# Altium PCB PCB1.PcbDoc (part 2 of 2)
Units mil, origin at the board's own origin, x right, y up, seen from the top; angles counter-clockwise.
Board outline 2700 x 1019 mil, 4 copper layers (L1, L2, L3, L4), stack 61.581 mil thick; 64 components, 73 nets, 299 pads, 162 vias.
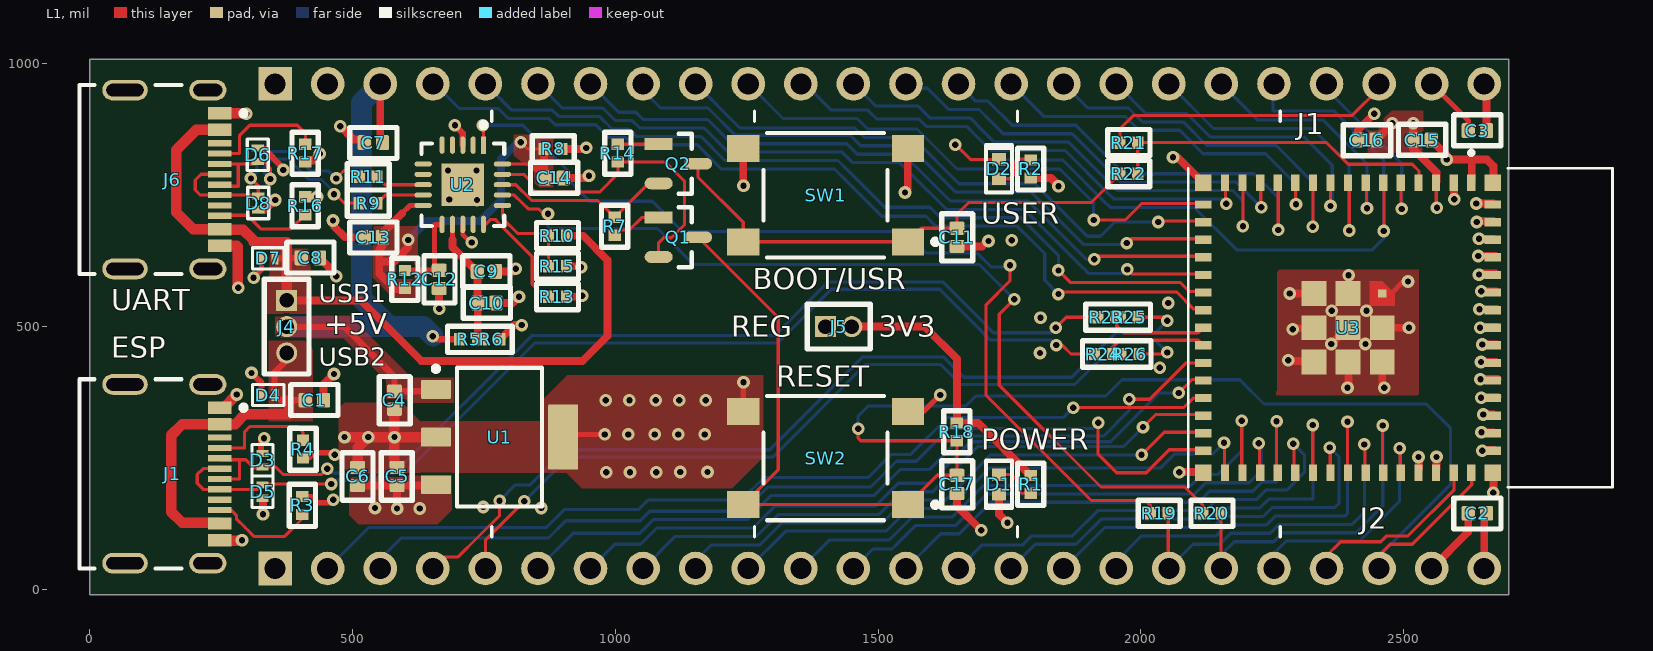
[diagram p0: L1 view]

## Part data (continued)
U1: "IC REG LINEAR 3.3V 1.5A SOT223-4", Case/Package=SOP, Dropout Voltage1-Max=550mV, Dropout Voltage1-Nom=340mV, Input Voltage Absolute-Max=20V, LCSC Part Number=C181262, Manufacturer="Texas Instruments", Min Input Voltage=3.8V, Operating Temperature, TJ-Max=125°C, Operating Temperature, TJ-Min=-40°C, Output Current1-Max=1.5A, Output Voltage1-Max=3.4V, Output Voltage1-Min=3.2V, Output Voltage1-Nom=3.3V, Package Body Material=Plastic, Package Shape=Rectangular, Peak Reflow Temperature (Cel)=260°C, Supplier Part Number=296-24897-1-ND, Voltage Tolerance-Max=3%, Adjustability=FIXED, Category="Voltage Regulators - Linear", Channels=1, ComponentLink1Description=https://www.ti.com:443/lit/ds/symlink/tl1963a.pdf?src-supplier=IHS+Markit, ComponentLink1URL=https://www.ti.com:443/lit/ds/symlink/tl1963a.pdf?src-supplier=IHS+Markit, ComponentLink2Description=https://datasheet.ciiva.com/2046/-2046068.pdf?src-supplier=Digikey, ComponentLink2URL=https://datasheet.ciiva.com/2046/-2046068.pdf?src-supplier=Digikey, Height - Seated (Max)=1.8mm, JESD-30 Code=R-PDSO-G4, JESD-609 Code=e3, Length=6.5mm, Manufacturer Part Number=TL1963A-33DCYR, Max Supply Voltage=20V, Moisture Sensitivity Level=2, Number of Outputs=1, Packaging="Tape and Reel", Pins=4, Pricing="1=2.76, 10=2.062, 25=1.8864, 100=1.6934, 250=1.60148, 500=1.54604, 1000=1.50041 (USD)", Qualification Status="Not Qualified", Reach SVHC Compliant=Yes, Regulator Type="FIXED POSITIVE SINGLE OUTPUT LDO REGULATOR", RoHS=Yes, RoHS Compliant=Yes, Stock=1664, Supplier=Digikey, Surface Mount=Yes, Technology=BIPOLAR, Terminal Finish=Tin, Terminal Form="Gull Wing", Terminal Pitch=2.3mm, Terminal Position=DUAL, Width=3.5mm
U2: "Microprocessor Circuit, CMOS", Case/Package=HVQCCN, LCSC Part Number=C132159, Manufacturer=FTDI, Max Operating Temperature=85°C, Max Supply Current=8.4mA, Max Supply Voltage=5.5V, Min Operating Temperature=-40°C, Min Supply Voltage=2.97V, Nominal Supply Voltage=5V, Package Shape=Square, Package Style="CHIP CARRIER, HEAT SINK/SLUG, VERY THIN PROFILEMeter", Power Supplies=3.3/5V, Supplier Part Number=768-1128-6-ND, Temperature Grade=INDUSTRIAL, Category="Interface ICs", ComponentLink1Description=https://datasheet.ciiva.com:443/pdfs/VipMasterIC/IC/FTDI/FTDIS00099/FTDIS00099-1.pdf?src-supplier=IHS+Markit, ComponentLink1URL=https://datasheet.ciiva.com:443/pdfs/VipMasterIC/IC/FTDI/FTDIS00099/FTDIS00099-1.pdf?src-supplier=IHS+Markit, ComponentLink2Description=https://datasheet.ciiva.com/1787/ds-ft231x-1787312.pdf?src-supplier=Digikey, ComponentLink2URL=https://datasheet.ciiva.com/1787/ds-ft231x-1787312.pdf?src-supplier=Digikey, ComponentLink3Description=https://datasheet.ciiva.com/4787/ds-ft231x-13571-4787570.pdf?src-supplier=Mouser, ComponentLink3URL=https://datasheet.ciiva.com/4787/ds-ft231x-13571-4787570.pdf?src-supplier=Mouser, ComponentLink4Description=https://datasheet.ciiva.com/30475/0900766b811020d3-30475405.pdf?src-supplier=Rs, ComponentLink4URL=https://datasheet.ciiva.com/30475/0900766b811020d3-30475405.pdf?src-supplier=Rs, ComponentLink5Description=https://datasheet.ciiva.com/1787/ft-x-series-1787313.pdf?src-supplier=Digikey, ComponentLink5URL=https://datasheet.ciiva.com/1787/ft-x-series-1787313.pdf?src-supplier=Digikey, ComponentLink6Description=https://datasheet.ciiva.com/1787/ft-x-series-1787314.pdf?src-supplier=Digikey, ComponentLink6URL=https://datasheet.ciiva.com/1787/ft-x-series-1787314.pdf?src-supplier=Digikey, Height - Seated (Max)=0.8mm, JESD-30 Code=S-XQCC-N20, Length=4mm, Manufacturer Part Number=FT231XQ-R, Pins=20, Pricing="1=2.34, 25=2.27, 100=2.2, 250=2, 500=1.82002, 1000=1.7625 (USD)", Qualification Status="Not Qualified", Reach SVHC Compliant=Yes, RoHS=Yes, RoHS Compliant=Yes, Stock=23367, Supplier=Digikey, Surface Mount=Yes, Technology=CMOS, Terminal Form="No Lead", Terminal Pitch=0.5mm, Terminal Position=QUAD, Width=4mm
U3: LCSC Part=C2980299, Manufacturer="Espressif Systems", Supplier Part Number=1965-ESP32-S3-MINI-1U-N8CT-ND, Category=LDO, ComponentLink1Description=https://datasheet.octopart.com/ESP32-S3-MINI-1U-N8-Espressif-Systems-datasheet-165560562.pdf?src-supplier=TME, ComponentLink1URL=https://datasheet.octopart.com/ESP32-S3-MINI-1U-N8-Espressif-Systems-datasheet-165560562.pdf?src-supplier=TME, Manufacturer Part Number=ESP32-S3-MINI-1U-N8, Pricing="1=5.28, 10=4.566, 25=4.3196, 100=3.9802, 250=3.7768 (USD)", RoHS=No, Stock=586, Supplier=Digikey

## Via types
v1: diameter 24, hole 12, L1 to L4, tented both sides, 162 vias

## Nets (pads, with @x,y where several pads share a name; then routed paths per layer and width w, separated by ;. In a path a pad name is that pad's centre, name@x,y a point inside that pad or via, vN(x,y) a via of type N, cw(c..) or ccw(c..) an arc to the next point about the centre after c; other vN are vias at no path point)
+3V3: C2.2 C3.2 C15.2 C16.2 J2.23 J3.24 J5.2 R1.2 R2.2 R6.1 R8.1 R18.2 U3.3 | length 4682
  L1 w6: v1@2561.79,727.21 U3.3@2561.79,767.59
  L1 w10: J2.23 2622.68,892.32 C3.2 ; v1@2561.79,727.21 v1(2563,726)
  L1 w15: R6.1 808.02,503 v1(822,503) ; R8.1 943,838 v1(945,840) ; J5.2 1589,500 1650,439 R18.2 1690,317.01 R1.2 ; R2.2 1828.99,782.99 1844,768 v1(1843.07,767.07) ; C16.2 2478,885.68 v1(2478,887) ; v1(2518,887) 2517.68,886.68 C15.2 2517.68,838.32 2562.36,793.64 U3.3@2562.36,775.59 ; J3.24 2653,140.68 C2.2
  L2 w15: v1(2478,887) v1(2518,887) ; J3.24 J3.24@2657,44
  L2 w20: 2500,869 2500,799 2529,770 2529,678 2602,605 2602,157 2657,102 J3.24@2657,44
  L2 w40: v1(822,503) 746,579 746,592 746,610 802,666 802,760 882,840 v1(945,840) 1562.13,840 1635.07,767.07 ; J5.2 1443,507 1443,590 1620.07,767.07 1635.07,767.07 ; J2.23 2553,922 v1(2518,887) 2500,869 2481,850 2136,850 2109,877 1945,877 1843.07,775.07 v1(1843.07,767.07) 1635.07,767.07
+3V3_FTDI: C13.2 C14.2 R8.2 R12.1 U2.10 U2.20 | length 856.1
  L1 w6: U2.20 843.7,809.37 ; v1(820,851) 833,838 R8.2 ; C14.2@856.85,796.22 856.85,791.14 C14.2@864.99,783
  L1 w10: 594,715 609.63,730.63 U2.10
  L1 w15: 594,715 557.32,678.32 C13.2 557.32,653.32 551,647 551,624 ; R12.1 599.01,572 580,572 551,601 551,624 ; v1(606,665) 606,651 602,647 579,624 551,624 ; 843.7,809.37 C14.2@856.85,796.22 ; C14.2@864.99,783 R8.2
  L4 w15: v1(606,665) 642,701 743,701 783,741 783,819 815,851 v1(820,851)
+3V3_REG: C5.2 C6.2 J5.1 U1.3 | length 1327.2
  L1 w15: C6.2 C5.2 ; v1(585,154) C5.2 ; v1(628,154) v1@629,153 ; U1.3 657.17,197.68 C5.2
  L2 w40: v1(543,155) 665,155 694,184 ; 1360,460 J5.1
  L2 w60: 694,184 737,227 767.29,227 877,227 933,171 1218,171 1360,313 1360,460
+5V: C4.2 C7.2 J2.3 J4.2 R5.2 U1.1 | length 1304.3
  L1 w12: J4.2 485,500 580,405 C4.2 655.71,377.32 U1.1 ; v1(653,482) 656.25,482 662.25,476 R5.2
  L1 w15: J2.3 553,854.32 C7.2
  L4 w40: J4.2 571,500 ; J2.3 517,926 517,554 571,500 ; v1(653,482) 635,500 571,500
+5V_VBUS1: C8.2 D7.2 J4.1 J6.A4B9 J6.B4A9 R10.2 | length 1532.6
  L1 w12: D7.2 375,630 401.68,630 C8.2
  L1 w15: J4.1 516,550 631,435 938,435 985,482 985,627 939,673 R10.2
  L1 w20: J6.A4B9 203.41,874.41 165,836 165,718 197.57,685.43 J6.B4A9 249.13,683.94 288.49,683.94 292.49,683.94 312,664.43 312,661 375,661 375,630 J4.1
+5V_VBUS2: C1.2 D4.2 J1.A4B9 J1.B4A9 J4.3 | length 668.2
  L1 w12: D4.2 D4.2@352,370.8 ; J4.3 375,436 352,413 D4.2@352,370.8 ; C1.2 380,360 362.8,360 D4.2@352,370.8
  L1 w20: J1.B4A9 246.23,127 176,127 155,148 155,293 176.57,314.57 J1.A4B9 277.04,314.57 295.47,333 380,333 380,360
+VCC_FTDI: C9.2 C10.2 R5.1 R6.2 U2.12 | length 240.3
  L1 w9: C9.2@729.64,611.67 C9.2@732.58,611.67
  L1 w10: 690.31,665.25 U2.12
  L1 w15: 690.31,665.25 690.31,651 C9.2@729.64,611.67 ; C9.2@732.58,611.67 737.68,606.57 C9.2 737.68,545.68 C10.2 R6.2@738.35,485.35 ; R6.2@738.35,476.35 R5.1 R6.2
BTN_GPIO0: C11.2 Q2.3 R22.1 SW1.1 SW1.2 | length 970
  L1 w6: Q2.3 1157.42,784.58 1243.5,698.5 SW1.2 SW1.1 1582.4,687.32 C11.2 1650,714 1672,736 1904.98,736 R22.1
CHIP_PU: C17.2 J3.22 Q1.3 R18.1 SW2.1 SW2.2 U3.45 | length 3125.5
  L1 w6: Q1.3 1310,517.42 1310,227.91 SW2.2 SW2.1 1612.4,217.32 C17.2 R18.1 1467.01,282.99 1462,288 v1(1462,306) ; J3.22 2453,65 2474,86 2516,86 2629.29,199.29 U3.45@2629.29,224.41
  L4 w6: v1(1462,306) 1462,330 1481,349 1667,349 1686,368 1933,368 1964,399 2188,399 2234,353 2297,353 2542.5,353 2589,306.5 2589,200 2474,85 2453,64 J3.22
CON1_USB_N: D6.2 J6.A7 J6.B7 R9.1 | length 456.5
  L1 w6.03: J6.A7 250.72,767 283,767 283,809.45 ; J6.B7 283,809.45 ; v1(344,781) 344,801 330.8,814.2 D6.2 315.24,809.45 283,809.45 ; v1(465,752) 468,752 485,735 R9.1
  L4 w6.03: v1(344,781) 332.51,792.48 332.51,802.52 349,819 378,819 417,780 441.28,780 460.3,760.98 465,760.98 v1(465,752)
CON1_USB_P: D8.2 J6.A6 J6.B6 R11.1 | length 508.9
  L1 w6.03: J6.A6 247.4,790 212,790 201,779 201,760 210.61,750.39 J6.B6 321,750.39 D8.2 321,768 v1(307,782) ; v1(469,782) 484,797 500.99,797 504.2,793.8 505.38,793.8 512.99,786.18 R11.1
  L4 w6.03: v1(307,782) 318.49,793.48 318.49,814.48 337.03,833.03 383.81,833.03 420.84,796 455,796 v1(469,782)
CON2_USB_N: D3.2 J1.A7 J1.B7 R23.1 | length 1969.3
  L1 w6.03: J1.A7 285,210.24 285,247 ; J1.B7 250.24,247 285,247 ; v1(452.26,229.74) 441.53,219 368,219 354,233 D3.2 327,231 313,231 297,247 285,247 ; v1(1838,498) 1858,518 R23.1
  L4 w6.03: v1(452.26,229.74) 460.23,221.77 580,221.77 841.23,483 1303,483 1405.11,585.11 1622.73,585.11 1694.92,512.92 1719.33,488.52 1828.51,488.52 v1(1838,498)
CON2_USB_P: D5.2 J1.A6 J1.B6 R24.1 | length 1995.3
  L1 w6.03: J1.A6@244.72,227 J1.A6 215.92,229.92 205,219 205,202 216.45,190.55 J1.B6 320.55,190.55 331,201 453.18,201 456.47,204.29 v1(460,200.75) ; v1(1839,465) 1850,465 1867,448 R24.1
  L4 w6.03: v1(460,200.75) 460,207.74 509,207.74 585.81,207.74 847.05,468.97 1308.81,468.97 1410.92,571.08 1616.92,571.08 1680.89,507.11 1713.51,474.48 1829.51,474.48 v1(1839,465)
CON_ESP_USB_N: J3.4 R25.1 | length 1698
  L1 w6.03: J3.4 675,62 701.16,62 738.97,99.81 780,140.84 v1(780,169) ; R25.1 2043.3,518 v1(2050,511.3)
  L4 w6.03: v1(780,169) 810,199 838.16,199 904.96,265.8 908.8,265.8 1293.83,265.8 1470.01,441.99 1625.01,441.99 1663.08,403.92 1868.08,403.92 1952.32,488.16 2026.87,488.16 v1(2050,511.3)
CON_ESP_USB_P: J3.5 R26.1 | length 1604.8
  L1 w6.03: J3.5 753,94 v1(827,168) ; R26.1 2047,448 v1(2050,451)
  L4 w6.03: v1(827,168) 910.77,251.77 1299.64,251.77 1475.82,427.96 1619.2,427.96 1657.27,389.89 1873.89,389.89 1958.13,474.13 2026.87,474.13 v1(2050,451)
CON_GPIO0: J2.22 R21.1 | length 559.9
  L1 w6: R21.1 1959.99,875.99 1986,902 2402,902 2453,953 J2.22
DTR_FTDI: Q2.2 R7.1 U2.18 | length 349.8
  L1 w6: U2.18 810.94,770 839.94,741 840,741 ; 839.97,740.97 840.94,740 843.42,740 843.59,739.83 923.77,739.83 923.94,740 967.02,740 R7.1 1063.58,772.6 Q2.2
ESP_USB_N: R23.2 R25.2 U3.23 | length 193.6
  L1 w6.03: R25.2 1954,511.01 1954,501 1966.72,488.28 2108.73,488.28 U3.23
ESP_USB_P: R24.2 R26.2 U3.24 | length 194.7
  L1 w6.03: R24.2 1945.7,459.95 1960,474.25 2108.73,474.25 U3.24
FTDI_RESET: C12.2 R12.2 U2.11 | length 169.6
  L1 w10: R12.2 600.31,607.32 C12.2 656,616.32 656,694 U2.11@670.04,694
FTDI_USB_N: R9.2 U2.9 | length 93.9
  L1 w6.03: R9.2 562.32,750.31 U2.9
FTDI_USB_P: R11.2 U2.8 | length 93.8
  L1 w6.03: R11.2 562.01,770 U2.8
GND: C1.1 C2.1 C3.1 C4.1 C5.1 C6.1 C7.1 C8.1 C9.1 C10.1 C11.1 C12.1 C13.1 C14.1 C15.1 C16.1 C17.1 D1.1 D3.1 D4.1 D5.1 D6.1 D7.1 D8.1 J1.A1B12 J1.B1A12 J1.S1 J1.S2 J1.S3 J1.S4 J2.2 J2.24 J3.1 J3.23 J6.A1B12 J6.B1A12 J6.S1 J6.S2 J6.S3 J6.S4 R3.1 R4.1 R13.2 R15.2 R16.1 R17.1 SW1.3 SW1.4 SW2.3 SW2.4 U1.2 U1.4 U2.3 U2.13 U2.21 U3.1 U3.2 U3.42 U3.43 U3.46 U3.47 U3.48 U3.49 U3.50 U3.51 U3.52 U3.53 U3.54 U3.55 U3.56 U3.57 U3.58 U3.59 U3.60 U3.61 U3.62 U3.63 U3.64 U3.65 U3.66 U3.67 U3.68 U3.69 U3.70 U3.71 U3.72 U3.73 | length 3806.3
  L1 w9: U2.13 710.1,694.48 710.1,675.15 723.26,662 726.77,662 v1(726.77,660.24) ; v1@1243.5,393.5 v1(1244,394) ; 2476,562.96 2499.04,586 v1(2508,586)
  L1 w10: v1(312,593) 327.2,608.2 D7.1 ; R3.1 420.99,177.01 433,165 467,165 467,171 465.26,172.74 v1(463.47,170.95) ; R4.1 418,250 428,260 462.53,260 v1(466.25,256.27) ; U1.4 906.06,295 v1@978,295 ; SW2.4 v1@1243.5,393.5 ; SW2.3 1586.58,338.58 v1(1618,370)
  L1 w12: v1@316,404 327.2,392.8 D4.1 ; D6.1@324.92,839.8 D6.1 320.89,838.91 331.06,838.91 368.73,801.23 v1(368.73,797.98) ; D3.1 326,261.59 326,282 v1(332,288) ; v1(695,883) 710,868 U2.3 ; U3.69 2394.04,597.04 v1(2395,598)
  L1 w15: J1.A1B12 J1.A1B12@255.06,346.06 ; D8.1 321.61,723.02 333.81,723.02 351.79,741 v1(353,741) ; v1(330,143.41) D5.1@330,173.41 ; R16.1 v1(432.99,747.01) ; R17.1 413.13,816.12 424.9,816.12 437.69,828.91 v1(438.19,828.91) ; C8.1 469,599.32 v1(469,596) ; C1.1 445,390 v1(465,410) ; v1(463,702) 464.72,700.28 464.72,691.28 486,670 C13.1 ; v1(477,881) 501.97,856.03 517.58,856.03 522.68,850.94 C7.1 ; v1(665,534) C12.1 ; C9.1 806,605 v1(811,610) ; C10.1 805,545 v1(817,557) ; C14.1 946,783 v1(950,787) ; R13.2 935,557 v1(937,559) ; R15.2 933,615 v1(935,613) ; SW1.4 1243.5,768.5 v1(1244,768) ; v1(1551.13,755.13) 1556.5,760.5 SW1.3 ; C11.1 1697.68,652.68 v1@1702,657 ; C17.1@1651.38,181.3 C17.1 1650,159 v1(1696.43,112.57) ; D1.1 1730,143 v1(1746,127) ; v1(2061,822) 2070.04,822 U3.63 ; v1(2073,223) 2073.7,223.7 2118.74,223.7 U3.64@2119.45,224.41 ; v1(2280,436) 2281,435 U3.73@2328.88,435 ; v1(2283,563) U3.71@2331.88,563 ; v1(2289,495) 2291,497 U3.72@2331.88,497 ; v1(2362,467) U3.61@2395.04,500 ; v1(2393,384) 2395,386 U3.70@2395,436.88 ; C16.1 2412.68,873.68 v1(2444,905) ; U3.68@2459,439.88 2459,388 v1(2463,384) ; U3.67@2460.12,498 v1(2510,498) ; v1@2527,251 2528.79,249.21 U3.42@2528.79,229.37 ; C15.1 2582,825.32 v1(2582,818) 2582.29,817.71 2629.29,817.71 ; J3.23 2622.68,109.68 C2.1 ; U3.43@2562.25,229.37 v1(2562.25,252.25) ; v1(2595.83,742.17) U3.2@2595.83,775.59 ; U3.1@2629.29,775.59 2629.29,817.71 ; v1(2637.75,734.25) U3.60@2670.63,734.25 ; v1(2639,699) 2640.79,700.79 U3.59@2670.63,700.79 ; v1(2641.85,634.36) U3.57@2674.74,634.36 ; v1(2643,667) U3.58@2671.42,667 ; v1(2643.11,599.11) 2644.89,600.89 U3.56@2674.74,600.89 ; v1(2643.85,533.36) U3.54@2676.74,533.36 ; v1(2645.11,498.11) 2646.89,499.89 U3.53@2676.74,499.89 ; v1(2645.75,400.25) U3.50@2678.63,400.25 ; v1(2646.89,432.89) U3.51@2675.31,432.89 ; v1(2647,365) 2648.79,366.79 U3.49@2678.63,366.79 ; v1(2647.11,567.11) U3.55@2675.52,567.11 ; v1(2647.75,299.25) U3.47@2670.63,299.25 ; v1(2649,264) 2650.79,265.79 U3.46@2670.63,265.79 ; v1(2649.11,466.11) U3.52@2677.52,466.11 ; v1(2651,333) U3.48@2670.63,333 ; J2.24 2657.32,957.68 C3.1 ; v1(2670,184) 2670.63,184.63 U3.65@2670.63,224.41 ; U3.62@2670.63,775.59 2670.63,805.37 2658,818 2629,818 2629.29,817.71
  L1 w20: J1.B1A12 248.73,93 v1@280,93 ; J6.B1A12 280.06,653.94 282,652 282,575 v1(283,574) ; J6.A1B12 297.09,905.91 v1(298,905) ; J1.A1B12@255.06,346.06 v1(280,371) ; v1(485,290) v1(530,290) ; C6.1 510,270 v1(530,290) ; C4.1 v1(580,290) ; C5.1 580,237.32 v1(580,290) ; U1.2 v1(580,290) ; v1(530,290) v1(580,290)
  other v1: 290,94 859,155 749,157 983,223 1028,223 1078,223 1123.5,223.5 1175.5,223.5 2528,252 980,295 1025,295 1075,295 1120,295 1170,295 982,360 1027,360 1077,360 1122,360 1172,360 308,412 2036,422 1808,450 2427,467 1809,517 2363,530 2429,530 2052,545 1710,663 1754.5,664.5 737,741 684,742 682,797 736,797
GPIO0: R21.2 R22.2 U3.4 | length 638.3
  L1 w6: R22.2 R21.2 2353,850 2394,809 2516,809 2528.9,796.1 2528.9,775.59 U3.4@2530,774.49
GPIO1: J2.21 U3.5 | length 347.4
  L1 w6: v1@2494.79,725.21 U3.5@2494.79,765.59
  L4 w6: J2.21@2353,953 J2.21 2353,951.64 2437.64,867 2439,867 2496,810 v1(2496,724)
GPIO2: D2.1 J2.20 U3.6 | length 1547.1
  L1 w6: v1@1651.88,841.12 v1(1647,846) 1648,846 1676,818 1719,818 1719.7,818.7 D2.1 ; v1@2462.25,682 U3.6@2462.25,769.59
  L4 w6: v1(1647,846) 1676,817 1851.12,817 1933.12,735 1933.49,735 1941.49,727 2101,727 2182,646 2440,646 2462,668 v1(2462,682) 2462,816 2368,910 2251,910 2251,960 J2.20
GPIO3: J2.19 U3.7 | length 472.4
  L1 w6: v1@2428.79,726.21 U3.7@2428.79,766.59
  L4 w6: J2.19@2158,957 J2.19 2222,893 2347,893 2430,810 v1(2430,725)
GPIO4: J2.18 U3.8 | length 619.6
  L1 w6: v1@2396.25,683 U3.8@2396.25,770.59
  L4 w6: J2.18 2138,877 2326,877 2397,806 2396,805 v1(2396,683)
GPIO5: J2.17 U3.9 | length 598.4
  L1 w6: v1(2360.57,729.43) U3.9
  L4 w6: J2.17 2009.5,905.5 2086.87,905.5 2131.37,861 2310,861 2364,807 2364,732.85 v1(2360.57,729.43)
GPIO6: J2.16 U3.10 | length 724
  L1 w6: v1@2327.25,690 U3.10@2327.25,777.59
  L4 w6: J2.16 1899,916 1976.37,916 1999.37,893 2002.87,889.5 2080.25,889.5 2124.75,845 2257,845 2327,775 v1(2327,690)
GPIO7: J2.15 U3.11 | length 699.5
  L1 w6: v1@2293.79,734.21 U3.11@2293.79,774.59
  L4 w6: J2.15 1815,900 1892.37,900 1969.75,900 1996.25,873.5 2073.62,873.5 2118.12,829 2237,829 2295,771 v1(2295,733)
GPIO8: J2.14 U3.12 | length 846.5
  L1 w6: v1@2261.25,684 U3.12@2261.25,771.59
  L4 w6: J2.14 1685.95,929.05 1708.95,929.05 1755,883 1876,883 1968,791 2077.36,791 2215,791 2261,745 v1(2261,684)
GPIO9: J2.13 U3.13 | length 813.7
  L1 w6: v1@2227.79,728.21 U3.13@2227.79,768.59
  L4 w6: J2.13 1561.51,953.49 1594,953.49 1634.44,913.05 1691.95,913.05 1715.05,889.95 1738,867 1869,867 1953,783 1953.37,783 1961.37,775 2022.64,775 2059.36,775 2181,775 v1(2229,727)
GPIO10: J2.12 U3.14 | length 969.2
  L1 w6: v1@2194.25,691 U3.14@2194.25,778.59
  L4 w6: J2.12 1495,920 1575.25,920 1598.2,897.05 1641.07,897.05 1675.03,897.05 1699.05,873.03 1721.08,851 1862.37,851 1946.37,767 1946.75,767 1954.75,759 2016.02,759 2065.98,759 2174.37,759 2194,739.37 v1(2194,691)
GPIO11: J2.11 U3.15 | length 943.8
  L1 w6: v1@2160.79,735.21 U3.15@2160.79,775.59
  L4 w6: J2.11 1361,962 1411,912 1480.37,912 1497.37,895 1577.63,895 1591.58,881.05 1647.69,881.05 1668.41,881.05 1683.05,866.41 1714.46,835 1855.75,835 1939.75,751 1940.12,751 1948.12,743 2153,743 v1(2162,734)
GPIO12: J2.10 U3.16 | length 1006.3
  L1 w6: v1(1910,703) 1970,703 2001.25,734.25 U3.16@2119.45,734.25
  L4 w6: J2.10 1319,896 1404.37,896 1460,896 1480,876 1574,876 1650,800 1845.49,800 1910.75,734.75 1910,734 v1(1910,703)
GPIO13: J2.9 U3.17 | length 1098.5
  L1 w6: v1(2033,699) 2034.79,700.79 U3.17@2119.45,700.79
  L4 w6: J2.9 1237,878 1455.37,878 1473.37,860 1566,860 1654,772 1798,772 1898,672 1923,672 1950,699 v1(2033,699)
GPIO14: J2.8 U3.18 | length 1205.5
  L1 w6: v1(1973,659) 1981.32,667.32 U3.18@2119.45,667.32
  L4 w6: J2.8 1053,949 1086,916 1176.37,916 1228.37,864 1391.12,864 1446.75,864 1466.75,844 1559.37,844 1647.37,756 1791.37,756 1891.37,656 1970,656 v1(1973,659)
GPIO15: J2.7 U3.19 | length 1307.2
  L1 w6: v1(1911,628) 1916.86,633.86 U3.19@2119.45,633.86
  L4 w6: J2.7 1007,908 1039,908 1053,894 1175.75,894 1221.75,848 1384.49,848 1440.12,848 1460.12,828 1547.68,828 1572.01,803.68 1572.31,803.68 1636.8,739.19 1784.81,739.19 1896,628 v1(1911,628)
GPIO16: J2.6 U3.20 | length 1422.8
  L1 w6: v1(1974,608.86) 1974.07,608.93 1982.61,600.39 U3.20@2119.45,600.39
  L4 w6: J2.6 899,916 976.37,916 1000.37,892 1032.37,892 1046.37,878 1169.12,878 1215.12,832 1377.86,832 1432,832 1452,812 1541.06,812 1564.06,789 1564.36,789 1630.17,723.19 1778.19,723.19 1889.37,612 1890,612 1901,601 1966.14,601 v1(1974,608.86)
GPIO17: J2.5 U3.21 | length 1546.9
  L1 w6: v1(1843,607) 1866.14,583.86 2075.14,583.86 2092.07,566.93 U3.21@2119.45,566.93
  L4 w6: J2.5 803,912 880.37,912 892.37,900 969.75,900 993.75,876 1025.75,876 1039.75,862 1162.49,862 1208.49,816 1371.24,816 1423.75,816 1443.37,796.37 1512.65,727.09 1598.77,727.09 1618.68,707.19 1771.56,707.19 1843,635.75 v1(1843,607)
GPIO18: J2.4 U3.22 | length 1677.2
  L1 w6: v1(1843,562) 1847,566 2068,566 2100.54,533.46 U3.22@2119.45,533.46
  L4 w6: J2.4 656,962 703,915 777.37,915 796.37,896 873.75,896 885.75,884 963.12,884 987.12,860 1019.12,860 1033.12,846 1155.86,846 1201.86,800 1364.61,800 1417.12,800 1437.56,779.56 1507.12,710 1591.05,710 1609.86,691.19 1764.93,691.19 1817,639.12 1817,588 v1(1843,562)
GPIO21: J3.6 U3.25 | length 1439.7
  L1 w6: v1(1978,362) 2017,362 2086.07,431.07 U3.25
  L4 w6: J3.6 920,107 1046.37,107 1072.37,133 1251,133 1297,179 1486,179 1492.6,179 1541.6,228 1597,228 1661,292 1929,292 1978,341 v1(1978,362)
GPIO26: J3.7 U3.26 | length 1315.4
  L1 w6: v1(2072,374) 2097.61,399.61 U3.26@2119.45,399.61
  L4 w6: J3.7 999,86 1048,86 1079,117 1262.12,117 1295.12,150 1304.12,159 1495.22,159 1538.22,202 1597,202 1676,281 1942,281 2035,374 v1(2072,374)
GPIO33: J3.8 U3.28 | length 1187.7
  L1 w6: v1(2004,309) 2027.68,332.68 U3.28@2119.45,332.68
  L4 w6: J3.8 1114,101 1268.75,101 1310.75,143 1501.85,143 1544.85,186 1603.63,186 1689.63,272 1967,272 v1(2004,309)
GPIO34: J3.9 U3.29 | length 1082.6
  L1 w6: v1(2001.18,256.18) 2044.21,299.21 U3.29@2119.45,299.21
  L4 w6: J3.9 1153,55 1183,85 1275.37,85 1315.37,125 1317.37,127 1508.48,127 1551.48,170 1610.25,170 1628,170 1714,256 1953.63,256 1953.81,256.18 v1(2001.18,256.18)
GPIO35: J3.10 U3.31 | length 1044.4
  L1 w6: U3.31@2159.21,237.41 v1@2159.21,277.79
  L4 w6: J3.10 1324,111 1515.11,111 1558.11,154 1616.88,154 1634.63,154 1711.63,231 2037,231 2064,258 2137,258 v1(2158,279)
GPIO36: J3.11 U3.32 | length 1076
  L1 w6: U3.32@2191.75,233.41 v1@2191.75,321
  L4 w6: J3.11 1407,94 1512.06,94 1514.37,94 1519.1,94.39 ; 1519.15,94.39 ccw(c1518.61,100.37) 1522.86,96.12 1564.73,138 1605.75,138 1632.75,138 1641.25,138 1701.25,198 1820.49,198 1896,198 2096,198 2117,219 2147,219 2192,264 v1(2192,321)
GPIO37: J3.12 U3.33 | length 947.5
  L1 w6: U3.33@2225.21,236.41 v1@2225.21,276.79
  L4 w6: J3.12 1490,77 1526.36,77 1534.36,85 1571.36,122 1612.37,122 1639.37,122 1647.88,122 1707.88,182 1904.49,182 2102.63,182 2123.63,203 2205.98,203 2223.98,221 2229,226 2229,273 v1(2224,278)
GPIO38: J3.13 U3.34 | length 975.9
  L1 w6: U3.34@2257.75,232.41 v1@2257.75,320
  L4 w6: J3.13 1619,106 1646,106 1654.51,106 1714.51,166 2109.25,166 2115.25,172 2130.25,187 2212.61,187 2230.61,205 2258,205 v1(2258,320)
GPIO39: J3.14 U3.35 | length 836.9
  L1 w6: U3.35@2291.21,235.41 v1@2291.21,275.79
  L4 w6: J3.14 1698,85 1775.37,85 1792.37,102 1869.75,102 1917.75,150 2123.25,150 2144.25,171 2219.24,171 2237.24,189 2277,189 2311,223 2311,256 v1(2290,277)
GPIO40: J3.15 U3.36 | length 857.3
  L1 w6: U3.36@2326.75,225.41 v1@2326.75,313
  L4 w6: J3.15 1799,86 1876.37,86 1924.37,134 2129.88,134 2150.88,155 2225.86,155 2242.86,172 2327,172 v1(2327,313)
GPIO41: J3.16 U3.37 | length 729.2
  L1 w6: U3.37@2360.21,228.41 v1@2360.21,268.79
  L4 w6: J3.16 1931,118 2136.51,118 2157.51,139 2232.49,139 2249.49,156 2369,156 2377,164 2377,252 v1(2359,270)
GPIO42: J3.17 U3.38 | length 753.6
  L1 w6: U3.38@2392.75,231.41 v1@2392.75,319
  L4 w6: J3.17 1953,54 2001,102 2143.14,102 2164.14,123 2239.12,123 2256.12,140 2388.49,140 2393,144.51 v1(2393,319)
GPIO45: J3.20 U3.41 | length 450.2
  L1 w6: U3.41@2493.21,227.41 v1@2493.21,267.79
  L4 w6: J3.20 2253,69 2276,92 2415.63,92 2492,168.37 v1(2492,269)
GPIO46: J3.21 U3.44 | length 353.5
  L1 w6: J3.21 2353,64 2380,91 2456.37,91 2467.37,102 2508,102 2595.83,189.83 U3.44@2595.83,224.41
GPIO47: J3.2 U3.27 | length 1799.7
  L1 w6: v1(1871,346) 2081,346 2099.14,364.14 U3.27
  L4 w6: J3.2 531,118 869,118 903,152 1044,152 1062,170 1240,170 1283,213 1481,213 1525,257 1562,257 1632,327 1852,327 v1(1871,346)
GPIO48: J3.3 U3.30 | length 1785.2
  L1 w6: v1(1919,317) 1918,316 1918,258 1954,222 2010,222 2053.75,265.75 U3.30@2119.45,265.75
  L4 w6: J3.3 553,58 593,98 873,98 905.69,130.69 1047.43,130.69 1065.75,149 1244.37,149 1290.37,195 1485.97,195 1534.97,244 1572.8,244 1634.8,306 1908,306 v1(1919,317)
NetD1_2: D1.2 R1.1 | length 83.6
  L1 w5: D1.2 1753.3,218.7 1769,203 1769,188 1774.01,182.99 R1.1
NetD2_2: D2.2 R2.1 | length 88.7
  L1 w6: D2.2 1750.3,781.3 1759,790 1759,811 1767,819 1788.01,819 R2.1
NetJ1_A5: J1.A5 R4.2 | length 212.3
  L1 w6: J1.A5 294.29,269.29 295,270 295,300 305,310 395,310 406,299 R4.2
NetJ1_B5: J1.B5 R3.2 | length 204.2
  L1 w6: J1.B5 269.22,151.18 279.28,141.13 279.28,134.72 296,118 296,117.64 298.64,115 298.7,115 312.7,101 371,101 405,135 R3.2
NetJ6_A5: J6.A5 R17.2 | length 232.6
  L1 w6: J6.A5 284.13,829.13 285,830 285,863 305,883 323,883 395,883 410,868 411,868 411,848.01 R17.2
NetJ6_B5: J6.B5 R16.2 | length 184.8
  L1 w6: J6.B5 248.61,712 300.19,712 300.19,711.79 325.98,686 383.01,686 R16.2
NetQ1_1: Q1.1 R7.2 | length 97.4
  L1 w6: R7.2 1009,684 1027,684 1050.4,707.4 Q1.1
NetQ2_1: Q2.1 R14.2 | length 77.7
  L1 w6: R14.2 1082.18,847.01 Q2.1
NetR13_1: R13.1 U2.15 | length 219.4
  L1 w6: U2.15 753.59,694.59 763,704 772,704 773.41,702.59 773.41,701.62 842,633.03 842,581 866,557 R13.1
RTS_FTDI: Q1.2 R14.1 U2.19 | length 592.3
  L1 w6: U2.19 825.94,789.69 838,777.63 838,765.57 847.57,756 850.04,756 850.22,755.83 882.49,755.83 882.67,756 884.69,756 884.86,755.83 917.14,755.83 917.31,756 970,756 1005,791 R14.1 1095.01,812.99 1131.92,776.08 1131.92,694.26 1117.71,680.05 1117.71,679.71 1107,669 1092,669 1082.58,659.58 Q1.2
RXD_FTDI: R19.2 U2.1 | length 1845.3
  L1 w6: v1(748,883) 749.37,881.63 U2.1 ; v1(1751,617) 1751,587 1705,541 1705,370 1906,169 2009.5,169 2017.99,160.51 R19.2
  L4 w6: v1(748,883) 824,883 912,795 912,778 951.5,738.5 1070.5,738.5 1128,681 1551,681 1592,640 1688.49,640 1714.66,613.83 1747.83,613.83 v1(1751,617)
TXD_FTDI: R20.2 U2.17 | length 1744.7
  L1 w6: U2.17 808,750.31 823.97,734.34 834.32,724 836.79,724 836.96,723.83 854.48,723.83 863.48,714.83 v1(872,714.83) ; v1(1759,552) 1730.5,523.5 1730.5,388.5 1924,195 2083,195 2117.99,160.01 R20.2
  L4 w6: v1(872,714.83) 872,686.64 1080.36,686.64 1149,618 1693,618 v1(1759,552)
U0RXD: J3.19 R20.1 U3.40 | length 717.9
  L1 w6: R20.1 2152.01,40.99 J3.19 ; U3.40@2459.75,224.41 v1@2459.75,312
  L4 w6: J3.19 2153,66.61 2177.39,91 2252.37,91 2269.37,108 2409,108 2460,159 v1(2460,312)
U0TXD: J3.18 R19.1 U3.39 | length 691.1
  L1 w6: R19.1 2052.01,40.99 J3.18 ; U3.39@2426.21,234.41 v1@2426.21,274.79
  L4 w6: J3.18 2099,86 2135.36,86 2149.76,86 2170.76,107 2245.75,107 2262.75,124 2402,124 2425,147 v1(2425,276)
VBUS_SENSE: R10.1 R15.1 U2.16 | length 183.5
  L1 w6: U2.16 785.41,706.59 815,677 868.98,677 R10.1 R15.1
pads on no net: J1.A8 J1.B8 J2.1 J6.A8 J6.B8 U2.2 U2.4 U2.5 U2.6 U2.7 U2.14

## Polygon pours and split planes (outlines as drawn)
GND on L1 "NONET_L-01_P-001" (solid, pour order 23): 2259,377.5 2259,603.5 2263.5,608 2528,608 2528,371 2526.5,369.5 2257.5,369.5 2257.5,395.5
GND on L1 "NONET_L-01_P-001" (solid, pour order 24): 493.5,222 474,241.5 474,345 484.5,355.5 594.5,355.5 629.5,320.5 859.5,320.5 859.5,358.5 909,408 1281.5,408 1281.5,252 1222,192.5 936.5,192.5 907,222
+3V3_REG on L1 "NONET_L-01_P-001" (solid, pour order 22): 494,216 689,216 689,151 662,124 511,124 494,141
+5V_VBUS2 on L1 "NONET_L-01_P-001" (solid, pour order 20): 340,320 341,321 341,473 409,473 425,457 425,433 425,320 341,320
+5V on L1 "NONET_L-01_P-001" (solid, pour order 21): 353,478 353,521 495,521 613,403 692,403 693,402 693,355 609,355 601,363 564,363 564,397 483,478
+5V_VBUS1 on L1 "NONET_L-01_P-001" (solid, pour order 18): 342,585 343.5,648 421,648 421,525 336,525 336,585
+3V3_FTDI on L1 "NONET_L-01_P-001" (solid, pour order 19): 624,554 624,555 624,691 541,691 540,692 539,691 539,593 578,554 623,554
+3V3_FTDI on L1 "NONET_L-01_P-001" (solid, pour order 16): 807,826 807,865 882,865 882,806 882,765 855,765 846,774 846,794 808.5,824.5
+3V3 on L1 "NONET_L-01_P-001" (solid, pour order 17): 2431,873 2449,873 2462,886 2462,896 2477,911 2537,911 2537,835 2533,831 2431,831 2533,831 2431,831
+3V3 on L2 "NONET_L-01_P-001" (solid, remove dead copper, pour order 26): 794,472 794.5,471.5 846,471.5 846,521 839.5,527.5 827,527.5 776,578.5 776,606 825.5,655.5 825.5,751 827.5,751 891.5,815 1552,815 1552,813 1592.5,772.5 1417.5,597.5 1417.5,543.5 1420.5,540.5 1420.5,492 1432.5,492 1446,478.5 1471.5,478.5 1471.5,513.5 1477,519 1466,530 1466,584.5 1626,744.5 1841.5,744.5 1946,849 2091,849 2122,818 2482,818 2484,816 2484,784.5 2488.5,784.5 2514,759 2513.5,758.5 2513.5,674.5 2588.5,599.5 2586,597 2586,149 2645.5,89.5 2643.5,87.5 2643.5,72.5 2621,72.5 2610,61.5 2611,60.5 2611,10 2623.5,-2.5 2699,-2.5 2699,929 2693,923 797.5,923 776,901.5 776,678.5 709.5,612 709.5,555 794,470.5
GND on L2 "NONET_L-01_P-001" (solid, pour order 27): -4.75,15 -1.75,18 -1.75,1000.5 2700.25,1000.5 2691.25,991.5 2691.25,-0.5 13.75,-0.5 -1.75,15
+3V3_REG on L2 "NONET_L-01_P-001" (solid, pour order 25): 502,120.5 500.5,122 500.5,259 913,259 960.5,211.5 1208.5,211.5 1331,334 1331,521 1420.5,521 1420.5,477.65 1390.32,295.32 1359.5,264.5 1232.5,137.5 1205.5,137.5 893.5,137.5 893.5,165 861.5,197 751.5,197 673,118.5 497.5,118.5
GND on L3 (split plane): 2699.95,-9.95 0.05,-9.95 0.05,1008.95 2699.95,1008.95

## Silkscreen, mask and mechanical layers (free items; w line width, h text height)
Top Overlay:
  lines w6: 765,100 765,120 ; 765,890 765,910 ; 1265,100 1265,120 ; 1265,890 1265,910 ; 1765,100 1765,120 ; 1765,890 1765,910 ; 2265,100 2265,120 ; 2265,890 2265,910
  text "J1" at 2296,866 h40
  text "USER" at 1696,696 h40
  text "BOOT/USR" at 1261.72,571 h40
  text "USB1" at 436,546 h35
  text "UART" at 41,531 h40
  text "+5V" at 446,486 h40
  text "REG" at 1221,481 h40
  text "3V3" at 1501,481 h40
  text "ESP" at 41,441 h40
  text "USB2" at 436,426 h35
  text "RESET" at 1306.7,386 h40
  text "POWER" at 1696,266 h40
  text "J2" at 2416,116 h40
Bottom Overlay:
  text "NC" at 385,879 h40 r90
  text "GND" at 485,879 h40 r90
  text "5V" at 585,879 h40 r90
  text "IO18" at 685,879 h40 r90
  text "IO17" at 785,879 h40 r90
  text "IO16" at 885,879 h40 r90
  text "IO15" at 985,879 h40 r90
  text "IO14" at 1085,879 h40 r90
  text "IO13" at 1185,879 h40 r90
  text "IO12" at 1285,879 h40 r90
  text "IO11" at 1385,879 h40 r90
  text "IO10" at 1485,879 h40 r90
  text "IO9" at 1585,879 h40 r90
  text "IO8" at 1685,879 h40 r90
  text "IO7" at 1785,879 h40 r90
  text "IO6" at 1885,879 h40 r90
  text "IO5" at 1985,879 h40 r90
  text "IO4" at 2085,879 h40 r90
  text "IO3" at 2185,879 h40 r90
  text "IO2" at 2285,879 h40 r90
  text "IO1" at 2385,879 h40 r90
  text "IO0" at 2485,879 h40 r90
  text "3V3" at 2585,879 h40 r90
  text "GND" at 2685,879 h40 r90
  text "<---PIN1--->" at 2685,742 h40 r90
  text "Custom ESP-32 Practise Design" at 2334,635.99 h60
  text "Designed by Khandoker Al-Muhi Munem" at 2284,541 h45
  text "Inspired From \"How to Make Custom ESP32 Board in Altium Designer \" by Robert Feranec" at 2504,424.33 h25
  text "https://youtu.be/KWIzhbQaZZk?si=ODtmb7bfSKWXsanJ" at 2110,340 h60
  text "GND" at 385,265 h40 r90
  text "IO47" at 485,265 h40 r90
  text "IO48" at 585,265 h40 r90
  text "USB-" at 685,265 h40 r90
  text "USB+" at 785,265 h40 r90
  text "IO21" at 885,265 h40 r90
  text "IO26" at 985,265 h40 r90
  text "IO33" at 1085,265 h40 r90
  text "IO34" at 1185,265 h40 r90
  text "IO35" at 1285,265 h40 r90
  text "IO36" at 1385,265 h40 r90
  text "IO37" at 1485,265 h40 r90
  text "IO38" at 1585,265 h40 r90
  text "IO39" at 1685,265 h40 r90
  text "IO40" at 1785,265 h40 r90
  text "IO41" at 1885,265 h40 r90
  text "IO42" at 1985,265 h40 r90
  text "TXD" at 2085,265 h40 r90
  text "RXD" at 2185,265 h40 r90
  text "IO45" at 2285,265 h40 r90
  text "IO46" at 2385,265 h40 r90
  text "EN" at 2485,265 h40 r90
  text "GND" at 2585,265 h40 r90
  text "3V3" at 2685,265 h40 r90
Board Shape:
  lines w20: 0,996.5 0.5,997 ; 2696.5,0 2697.5,1 ; 0,-10 2700,-10 2700,1009 0,1009 0,-10

## Text inside footprints (layer, text, board x,y; h text height)
J3: Bottom Overlay "1" at 373,145 h60 r90